# Altium PCB Топология печатной платыV2.PcbDoc
Units mm, origin at the board's own origin, x right, y up, seen from the top; angles counter-clockwise.
Board outline 59.69 x 40.13 mm, 2 copper layers (Top Layer, Bottom Layer); 33 components, 28 nets, 133 pads, 2 vias.
Unrouted connection lines stored in the file: 15.
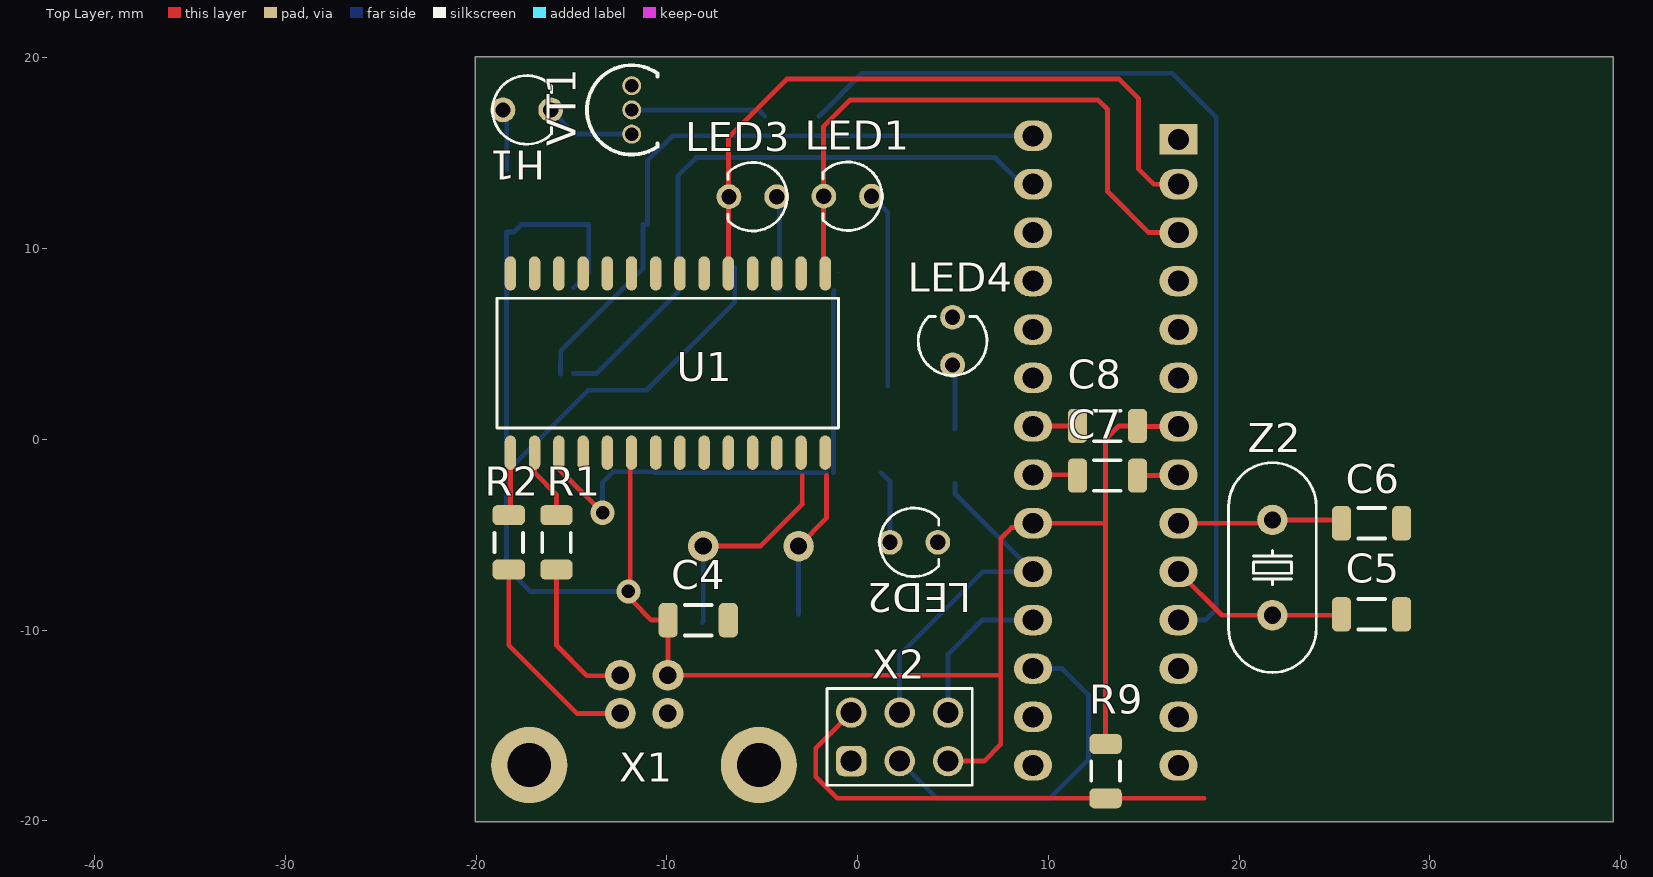
[diagram p0: Top Layer view]
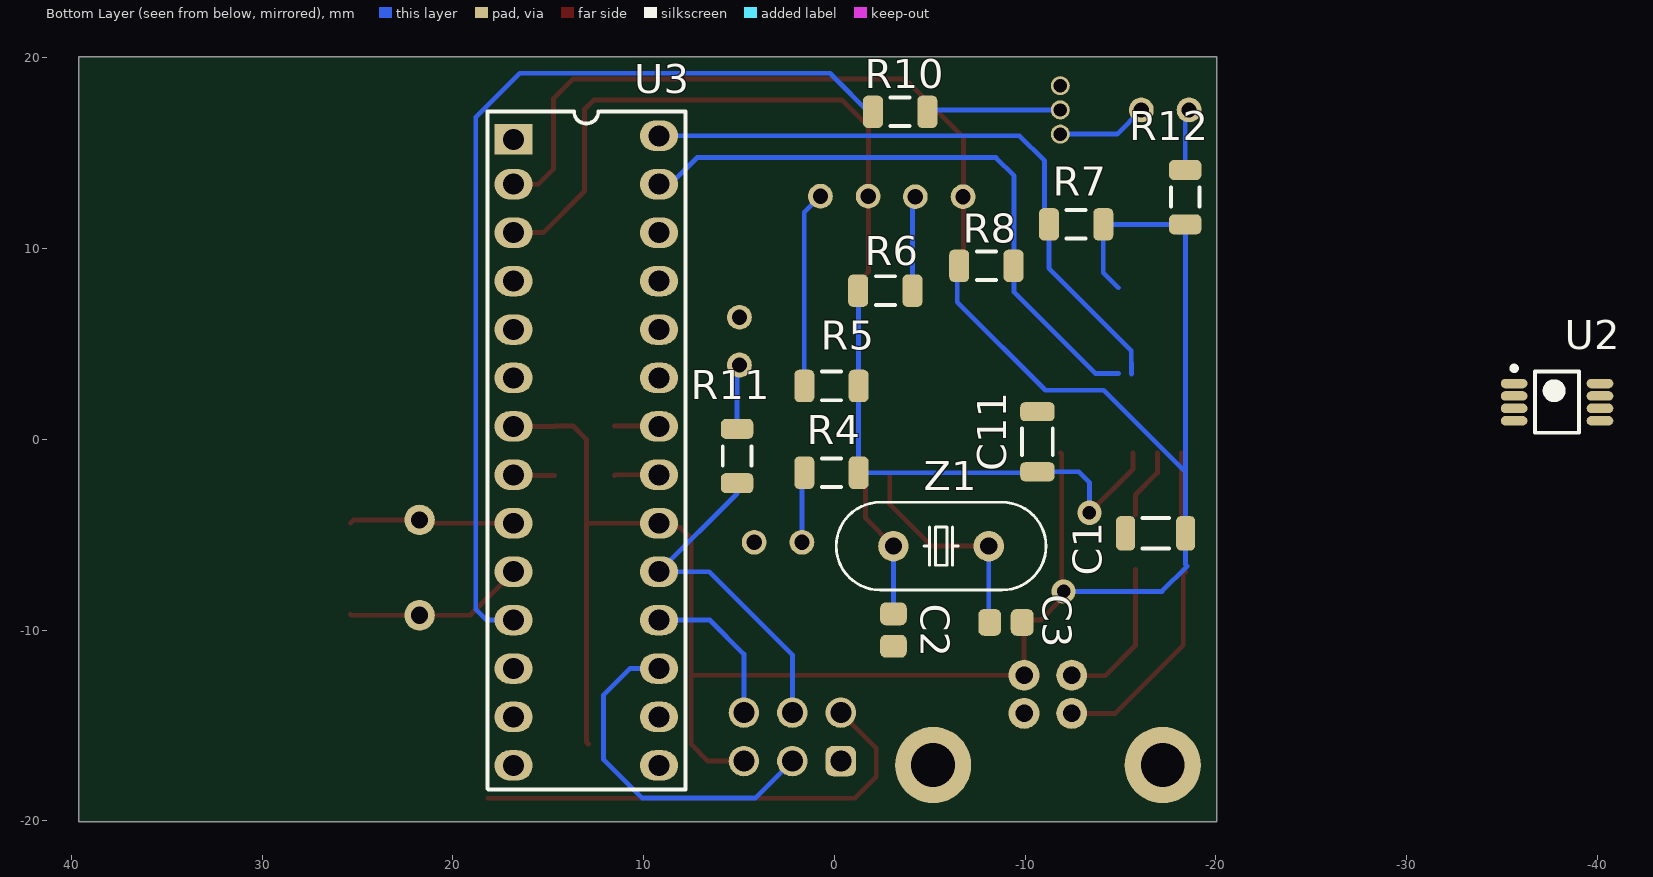
[diagram p1: Bottom Layer view, seen from below]

## Layer stack, top to bottom
Top Solder: solder mask 0.0102, Solder Resist, Dk 3.5
Top Layer: signal copper 0.0356
Dielectric 1: dielectric 0.32, FR-4, Dk 4.8
Bottom Layer: signal copper 0.0356
Bottom Solder: solder mask 0.0102, Solder Resist, Dk 3.5

## Board outline
-20.066,-20.066 39.625,-20.066 39.625,20.066 -20.066,20.066

## Design rules (kind name [scope] priority, off if disabled: settings)
Clearance [All] p1: gap=0.254 ignorepadtopadclearanceinfootprint=FALSE except(0: Arc-Hole Track-Hole SMDPad-Hole THPad-Hole Via-Hole Fill-Hole Poly-Hole Region-Hole Text-Hole)
PolygonConnect [All] p1: connectstyle=Relief reliefconductorwidth=0.254 reliefentries=4 polygonreliefangle="90 Angle" airgapwidth=0.254
RoomDefinition "Схема принципиальная ПУК-404-19" [InComponentClass('Схема принципиальная ПУК-404-19')] p1: confinementstyle=ConfineIn formatcopy=TRUE lockcomponents=FALSE outline -24.645,49.162 26.155,49.162 26.155,74.562 -24.645,74.562
RoutingVias [All] p1: holewidth=0.711 width=1.27 viastyle="Through Hole" minholewidth=0.711 minwidth=1.27 maxholewidth=0.711 maxwidth=1.27
SolderMaskExpansion [All] p1: expansion=0.102 istentingtop=FALSE
Width [All] p1: maxlimit=0.254 minlimit=0.254 preferedwidth=0.254
30 further rules are at their usual default settings.

## Components (designator, comment, footprint, x,y, rotation, side; value= is the part's Value field where it differs from the comment)
C1 "0.1 мкФ" C_1206 -16.85,-4.925 r0 bottom
C2 "10пФ" C_0805 -3.1,-10 r270 bottom
C3 "10пФ" C_0805 -9,-9.6 r180 bottom
C4 "0.1 мкФ" C_1206 -8.362,-9.483 r180 top
C5 "22пФ" C_1206 26.95,-9.175 r180 top
C6 "22пФ" C_1206 26.95,-4.4 r180 top
C7 "0.1 мкФ" C_1206 13.1,-1.9 r0 top
C8 "0.1 мкФ" C_1206 13.1,0.704 r0 top
C11 "0.1 мкФ" C_1206 -10.65,-0.125 r270 bottom
H1 "TSAL6200" ledrad3mm -17.35,17.275 r0 top
LED1 "LED" ledrad3mm -0.525,12.75 r180 top
LED2 "LED" ledrad3mm 2.95,-5.4 r0 top
LED3 "LED" ledrad3mm -5.5,12.725 r180 top
LED4 "LED" ledrad3mm 4.975,5.15 r90 top
R1 "27Om" R_1206 -15.796,-5.4 r270 top
R2 "27Om" R_1206 -18.3,-5.4 r270 top
R4 "1.5kOm" R_1206 0.15,-1.75 r0 bottom
R5 "1.5kOm" R_1206 0.15,2.8 r0 bottom
R6 "1.5kOm" R_1206 -2.675,7.8 r180 bottom
R7 "10kOm" R_1206 -12.679,11.275 r180 bottom
R8 "10kOm" R_1206 -7.975,9.1 r0 bottom
R9 "10kOm" R_1206 13,-17.4 r270 top
R10 "4.3kOm" R_1206 -3.45,17.175 r180 bottom
R11 "300Om" R_1206 5.1,-0.875 r90 bottom
R12 "33 Om" R_1206 -18.4,12.7 r270 bottom
U1 "PL2303HX" SO-28W -9.955,4 r270 top
U2 "LM75AD" TSSOP8 -37.9,1.95 r180 bottom
U3 "atmega328P" 27_DIP_7.62mm 16.83,15.73 r180 bottom
VT1 "BC547" TO-92-CBE -11.85,17.275 r0 top
X1 "USB_Type_B" USB_TypeB_Tyco -11.2,-17.2 r90 top
X2 "X_6" PLD-6 2.2,-15.6 r0 top
Z1 "12МГц" HC-49H -5.6,-5.6 r180 bottom
Z2 "16МГц" HC-49H 21.75,-6.725 r90 top

## Footprints (in the part's own frame and the unit in brackets; to place one, negate y for a bottom-side part, rotate by r counter-clockwise, add the part's x,y. Pads: shape width x height; smd on the part's side, far side on the other; paste and mask are expansions set on the pad)
27_DIP_7.62mm [mm]
  rect 2x1.6 hole 1.1: 1(0,0)
  oval 2x1.6 hole 1.1: 2(0.01,-2.35) 3(0.01,-4.89) 4(0.01,-7.43) 5(0.01,-9.97) 6(0.01,-12.51) 7(0.01,-15.05) 8(0.01,-17.59) 9(0.01,-20.13) 10(0.01,-22.67) 11(0.01,-25.21) 12(0.01,-27.75) 13(0.01,-30.29) 14(0.01,-32.83) 15(7.63,-32.83) 16(7.63,-30.29) 17(7.63,-27.75) 18(7.63,-25.21) 19(7.63,-22.67) 20(7.63,-20.13) 21(7.63,-17.59) 22(7.63,-15.05) 23(7.63,-12.51) 24(7.63,-9.97) 25(7.63,-7.43) 26(7.63,-4.89) 27(7.63,-2.35) 28(7.63,0.19)
  silkscreen extent -1.35,-34.1 9.02,1.46, body extent -0.23,-34.26 7.65,1.68, height 4.65
C_0805 [mm] "Chip Capacitor, 2-Leads, Body 2.00x1.25mm, IPC Medium Density"
  rrect50% 1.2x1.4 smd: 1(-0.85,0) 2(0.85,0)
  body extent -1.1,-0.72 1.1,0.72, height 1.45
C_1206 [mm] "Chip Capacitor, 2-Leads, Body 3.20x1.60mm, IPC Medium Density"
  rrect50% 1x1.8 smd: 1(-1.575,0) 2(1.575,0)
  silkscreen extent -0.7,-0.8 0.7,0.8, body extent -1.75,-0.9 1.75,0.9, height 1.8
HC-49H [mm]
  round 1.6 hole 0.9: 1(2.5,0) 2(-2.5,0)
  silkscreen extent -5.5,-2.3 5.5,2.3, body extent -5.4,-2.25 5.4,2.25, height 3.5
ledrad3mm [mm]
  round 1.3 hole 0.8: 1(-1.252,0) 2(1.252,0)
  silkscreen extent -1.8,-1.8 1.3,1.8, body extent -2.01,-2 1.5,2, height 15.5
PLD-6 [mm]
  rrect50% 1.6x1.6 hole 1.1: 1(-2.54,-1.27)
  round 1.6 hole 1.1: 2(-2.54,1.27) 3(0,-1.27) 4(0,1.27) 5(2.54,-1.27) 6(2.54,1.27)
  silkscreen extent -3.81,-2.54 3.81,2.54, body extent -3.81,-2.54 3.81,2.54, height 8.5
R_1206 [mm] "Chip Resistor, 2-Leads, Body 3.10x1.60mm, IPC Medium Density"
  rrect50% 1.05x1.7 smd: 1(-1.425,0) 2(1.425,0)
  silkscreen extent -0.5,-0.75 0.5,0.75, body extent -1.6,-0.85 1.6,0.85, height 0.65
SO-28W [mm] "JEDEC MS-013"
  oval 1.8x0.6 smd: 1(-4.7,8.255) 2(-4.7,6.985) 3(-4.7,5.715) 4(-4.7,4.445) 5(-4.7,3.175) 6(-4.7,1.905) 7(-4.7,0.635) 8(-4.7,-0.635) 9(-4.7,-1.905) 10(-4.7,-3.175) 11(-4.7,-4.445) 12(-4.7,-5.715) 13(-4.7,-6.985) 14(-4.7,-8.255) 15(4.7,-8.255) 16(4.7,-6.985) 17(4.7,-5.715) 18(4.7,-4.445) 19(4.7,-3.175) 20(4.7,-1.905) 21(4.7,-0.635) 22(4.7,0.635) 23(4.7,1.905) 24(4.7,3.175) 25(4.7,4.445) 26(4.7,5.715) 27(4.7,6.985) 28(4.7,8.255)
  silkscreen extent -3.4,-8.95 3.4,8.95, body extent -3.8,-8.95 3.8,8.95, height 2.57
TO-92-CBE [mm] "TO, Flat Index; 3 In-Line, Axial Leads; Body Dia. 4.6mm; Leads 0.41 x 0.39 mm (max)"
  round 1 hole 0.7: 1(0,0) 2(0,1.27) 3(0,-1.27)
  silkscreen extent -2.34,-2.34 1.35,2.34, body extent -2.5,-2.5 1.5,2.5, height 7
TSSOP8 [mm] "TSOP, 8-Leads, Body 3.00x2.95mm, Pitch 0.65mm, IPC Medium Density"
  oval 1.4x0.5 smd: 1(-2.25,0.975) 2(-2.25,0.325) 3(-2.25,-0.325) 4(-2.25,-0.975) 5(2.25,-0.975) 6(2.25,-0.325) 7(2.25,0.325) 8(2.25,0.975)
  silkscreen extent -2.38,-1.6 1.15,1.9, body extent -2.45,-1.6 2.45,1.6, height 1.1
USB_TypeB_Tyco [mm]
  round 1.626 hole 0.914: 1(4.83,-1.25) 2(4.83,1.25) 3(2.83,1.25) 4(2.83,-1.25)
  round 4 hole 2.3: MH(0.12,6.02) MH(0.12,-6.02)
  body extent -10.16,-7.47 6.14,7.43, height 11.6

## Part data
C1 C2 C3 C4 C5 C6 C7 C8 C11: library part C, ComponentLink1Description=link
  C1 C4 C7 C8 C11: ComponentLink1URL=https://www.chipdip.ru/product0/9000697437
  C2 C3: ComponentLink1URL=https://www.chipdip.ru/product0/27587
  C5 C6: ComponentLink1URL=https://www.chipdip.ru/product0/560852172
H1: library part LED, ComponentLink1Description=link, ComponentLink1URL=https://www.chipdip.ru/product/tsal6200?from=suggest_product
R1 R2 R4 R5 R6 R7 R8 R9 R10 R11 R12: library part Resistor, ComponentLink1Description=link
  R1 R2: ComponentLink1URL=https://www.chipdip.ru/product/0.25w-1206-27-om-1
  R4 R5 R6: ComponentLink1URL=https://www.chipdip.ru/product/0.25w-1206-1.5-kom-1
  R7 R8 R9: ComponentLink1URL=https://www.chipdip.ru/product/0.25w-1206-10-kom-1
  R10: ComponentLink1URL=https://www.chipdip.ru/product/0.25w-1206-4.3-kom-1
  R11: ComponentLink1URL=https://www.chipdip.ru/product/0.25w-1206-300-om-1
  R12: ComponentLink1URL=https://www.chipdip.ru/product/0.25w-1206-33-om-1
VT1: library part NPN_BEC, ComponentLink1Description=link, ComponentLink1URL=https://www.chipdip.ru/product0/8007169940
X1: library part X_4, ComponentLink1Description=link, ComponentLink1URL=https://www.chipdip.ru/product/usbb-1j
Z1 Z2: library part "Кварцевый резонатор", ComponentLink1Description=link
  Z1: ComponentLink1URL=https://www.chipdip.ru/product/12mhz-hc-49s
  Z2: ComponentLink1URL=https://www.chipdip.ru/product/16mhz-hc-49s
LED1: ComponentLink1Description=link, ComponentLink1URL=https://www.chipdip.ru/product/gnl-3012gd-green
LED2: ComponentLink1Description=link, ComponentLink1URL=https://www.chipdip.ru/product/gnl-3012yd
LED3 LED4: ComponentLink1Description=link, ComponentLink1URL=https://www.chipdip.ru/product/gnl-3012ed
U1: ComponentLink1Description=link, ComponentLink1URL=https://market.yandex.ru/product--mikroskhema-pl2303hx/101671693841?text=pl2303%20%D0%BA%D1%83%D0%BF%D0%B8%D1%82%D1%8C&cpc=bNKuNdDTZsqVRNy2uKVv1msD_OtO4zXlbxS3fj54qsreC0dGgIJAi4LfFARQF2DgdkCkHKwVvOfzqoQEYqosxJEXxp3WeedEOXoYck00HBR2kZwJYLRH-UzkT0PLe5991N8MS10oqEhLd1ZiK6d1Ruqlij-cSaPQ7uADsWt2oNhLhCuggyBAXmVDBIzF7xIC-kwi6xp3bTE%2C&sku=101671693841&do-waremd5=ySBio8NQJaHlgnQ9xQDWig&cpa=1&nid=61856
U2: ComponentLink1Description=link, ComponentLink1URL=https://www.chipdip.ru/product/lm75ad.118?from=suggest_product
U3: ComponentLink1Description=link, ComponentLink1URL=https://www.ozon.ru/product/atmega-328p-pu-dip-28-562350561/?asb=I9xK3DYnsq%252F6IhyX3W8scHwjgmDiM8Kzbmwyx3X6VIk%253D&asb2=VfizZ9RKUUordInhR9mkRyCkW2b-XBna7EclAgALVhcc5Z76v75_VL0e9uKFy7yB&avtc=1&avte=2&avts=1680886458&keywords=atmega+328p&sh=zeQ5esD1SA
X2: ComponentLink1Description=link, ComponentLink1URL=https://www.chipdip.ru/product/pld-6

## Via types
v1: diameter 1.27, hole 0.711, Top Layer to Bottom Layer, 2 vias

## Nets (pads, with @x,y where several pads share a name; then routed paths per layer and width w, separated by ;. In a path a pad name is that pad's centre, name@x,y a point inside that pad or via, vN(x,y) a via of type N, cw(c..) or ccw(c..) an arc to the next point about the centre after c; other vN are vias at no path point)
3.3V: C11.2 R4.1 R5.1 R6.1 U1.4 U1.17 | length 27.2
  Top Layer w0.254: U1.17 -15.67,-1.555 v1(-13.375,-3.85)
  Bottom Layer w0.254: v1(-13.375,-3.85) -13.375,-2.25 -12.825,-1.7 C11.2 ; C11.2@-10.65,-1.75 R4.1@-1.625,-1.75 ; R4.1 R5.1 -1.275,7.775 R6.1
GND: C1.2 C2.2 C3.2 C4.1 C5.1 C6.1 C7.2 C8.1 C11.1 LED2.2 LED4.2 U1.7 U1.18 U1.21 U1.25 U1.26 U2.4 U2.5 U2.6 U2.7 U3.8 U3.22 VT1.2 X1.4 X2.1 | length 4.5
  Top Layer w0.254: U3.22 9.224,0.704 C8.1 ; C7.2 16.78,-1.9 U3.8
NetC2_1: C2.1 U1.28 Z1.2 | length 7.9
  Top Layer w0.254: Z1.2 -1.64,-4.14 -1.64,-1.9
  Bottom Layer w0.254: C2.1 Z1.2
NetC3_1: C3.1 U1.27 Z1.1 | length 11.7
  Top Layer w0.254: Z1.1 -5.1,-5.6 -2.9,-3.4 -2.91,-3.39 -2.91,-1.9
  Bottom Layer w0.254: C3.1 -8.1,-9.55 Z1.1 Z1.1@-8.05,-5.65
NetC5_2: C5.2 U3.10 Z2.2 | length 9.5
  Top Layer w0.254: U3.10 19.105,-9.225 Z2.2 25.325,-9.225 C5.2
NetC6_2: C6.2 U3.9 Z2.1 | length 8.7
  Top Layer w0.254: U3.9 21.575,-4.4 Z2.1 25.2,-4.225 C6.2
NetC7_1: C7.1 U3.21 | length 2.3
  Top Layer w0.254: U3.21 11.485,-1.86 C7.1
NetH1_1: H1.1 R12.1 | length 3.2
  Bottom Layer w0.254: H1.1 -18.4,17.073 R12.1
NetH1_2: H1.2 VT1.3 | length 4.8
  Bottom Layer w0.254: H1.2 -14.828,16.005 VT1.3
NetLED1_1: LED1.1 R5.2 | length 10.3
  Bottom Layer w0.254: LED1.1 1.575,11.902 R5.2
NetLED1_2: LED1.2 U1.1 U3.3 | length 32.3
  Top Layer w0.254: U1.1 -1.8,8.8 -1.8,16.4 -0.4,17.8 12.6,17.8 13.1,17.3 13.1,13 15.26,10.84 U3.3
NetLED2_1: LED2.1 R4.2 | length 3.8
  Bottom Layer w0.254: R4.2@1.225,-1.75 1.698,-2.223 LED2.1
NetLED3_1: LED3.1 R6.2 | length 5
  Bottom Layer w0.254: LED3.1 -4.1,12.577 R6.2
NetLED3_2: LED3.2 U1.5 U3.2 | length 36.4
  Top Layer w0.254: U1.5 -6.78,15.82 -3.7,18.9 13.7,18.9 14.72,17.88 14.72,14.18 15.52,13.38 U3.2
NetLED4_1: LED4.1 R11.2 | length 3.4
  Bottom Layer w0.254: LED4.1 5.1,3.773 R11.2
NetR1_1: R1.1 U1.16 | length 3.7
  Top Layer w0.254: U1.16 -16.94,-1.76 -15.796,-2.904 R1.1
NetR1_2: R1.2 X1.2 | length 8.1
  Top Layer w0.254: R1.2 -15.796,-10.804 -14.2,-12.4 -12.48,-12.4 X1.2 X1.2@-12.375,-12.295
NetR2_1: R2.1 U1.15 | length 3.3
  Top Layer w0.254: R2.1 -18.21,-3.885 U1.15
NetR2_2: R2.2 X1.3 | length 11.5
  Top Layer w0.254: R2.2@-18.425,-6.95 R2.2 -18.3,-10.8 -14.73,-14.37 X1.3
NetR7_1: R7.1 U2.2 U3.28 | length 33.7
  Bottom Layer w0.254: -15.581,3.431 -15.581,4.002 -15.569,4.014 -15.569,4.656 -11.254,8.971 R7.1 ; R7.1@-11.025,11.275 -11.025,14.6 -9.705,15.92 U3.28
NetR8_1: R8.1 U2.1 U3.27 | length 32.9
  Bottom Layer w0.254: -14.9,3.45 -13.7,3.45 -9.425,7.725 -9.425,13.825 -8.475,14.775 7.2,14.775 8.595,13.38 U3.27
NetR9_2: R9.2 U3.1 X2.2 | length 25.3
  Top Layer w0.254: X2.2 -2.2,-16.19 -2.2,-17.7 -1.075,-18.825 11.6,-18.825 R9.2 14.2,-18.825 18.175,-18.825
  Bottom Layer w0.254: U3.1@16.53,15.73 U3.1
NetR10_1: R10.1 U3.11 | length 50.7
  Bottom Layer w0.254: R10.1@-2.025,16.95 0.225,19.2 16.5,19.2 18.8,16.9 18.8,-8.9 18.22,-9.48 U3.11
NetR10_2: R10.2 VT1.1 | length 7.1
  Bottom Layer w0.254: VT1.1 -5.2,17.275 R10.2@-4.875,16.95
NetR11_1: R11.1 U3.19 X2.4 | length 18.2
  Bottom Layer w0.254: X2.4 2.2,-11.3 6.56,-6.94 U3.19 5.1,-2.84 R11.1
NetU3_17: U3.17 X2.3 | length 18.7
  Bottom Layer w0.254: X2.3@1.7,-17.2 X2.3@1.7,-16.87 ; X2.3 4.13,-18.8 10.1,-18.8 12.1,-16.8 12.1,-13.4 10.72,-12.02 U3.17
NetU3_18: U3.18 X2.6 | length 8.3
  Bottom Layer w0.254: X2.6 4.74,-11.26 6.52,-9.48 U3.18
VCC: C1.1 C4.2 C8.2 R7.2 R8.2 R9.1 R12.2 U1.20 U2.8 U3.7 U3.20 X1.1 X2.5 | length 120.9
  Top Layer w0.254: U1.20 -11.926,-0.766 -11.926,-7.876 v1(-12.025,-7.975) -11.831,-8.169 -11.831,-8.47 -10.818,-9.483 C4.2 -9.95,-9.496 X1.1 7.48,-12.37 7.5,-12.35 ; X2.5 6.63,-16.87 7.5,-16 7.5,-12.35 ; R9.1@12.9,-15.975 13,-15.875 13,-4.4 ; C8.2@14.58,0.68 U3.7 ; C8.2 13.704,0.704 13,0 13,-4.4 ; 7.5,-12.35 7.5,-5.2 8.069,-4.631 8.969,-4.631 U3.20 13,-4.4
  Bottom Layer w0.254: -14.9,7.95 -14.104,8.746 R7.2 -17.627,11.275 -18.027,10.875 -18.425,10.875 -18.425,-1.725 ; v1(-12.025,-7.975) -17.175,-7.975 -18.5,-6.65 -18.425,-6.575 C1.1 -18.425,-1.725 ; R8.2 -6.45,9 -6.45,7.2 -11.075,2.575 -14.125,2.575 -18.425,-1.725
pads on no net: U1.2 U1.3 U1.6 U1.8 U1.9 U1.10 U1.11 U1.12 U1.13 U1.14 U1.19 U1.22 U1.23 U1.24 U2.3 U3.4 U3.5 U3.6 U3.12 U3.13 U3.14 U3.15 U3.16 U3.23 U3.24 U3.25 U3.26 X1.MH